# Altium PCB VDMEDA_7SegDisp.PcbDoc
Units mil, origin at the board's own origin, x right, y up, seen from the top; angles counter-clockwise.
Board outline 6000 x 4000 mil, 2 copper layers (Top Layer, Bottom Layer); 2 components, 10 nets, 20 pads, 8 vias.
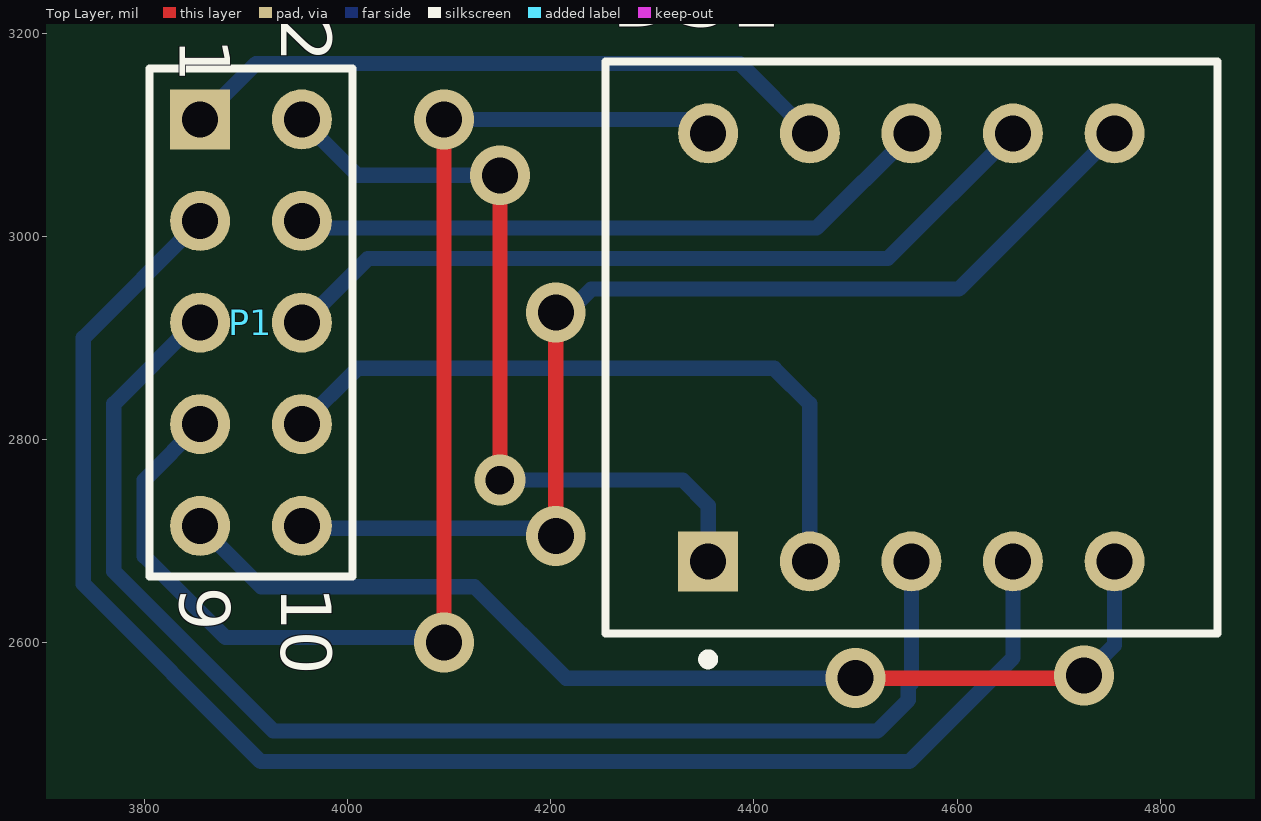
[diagram p0: Top Layer view]
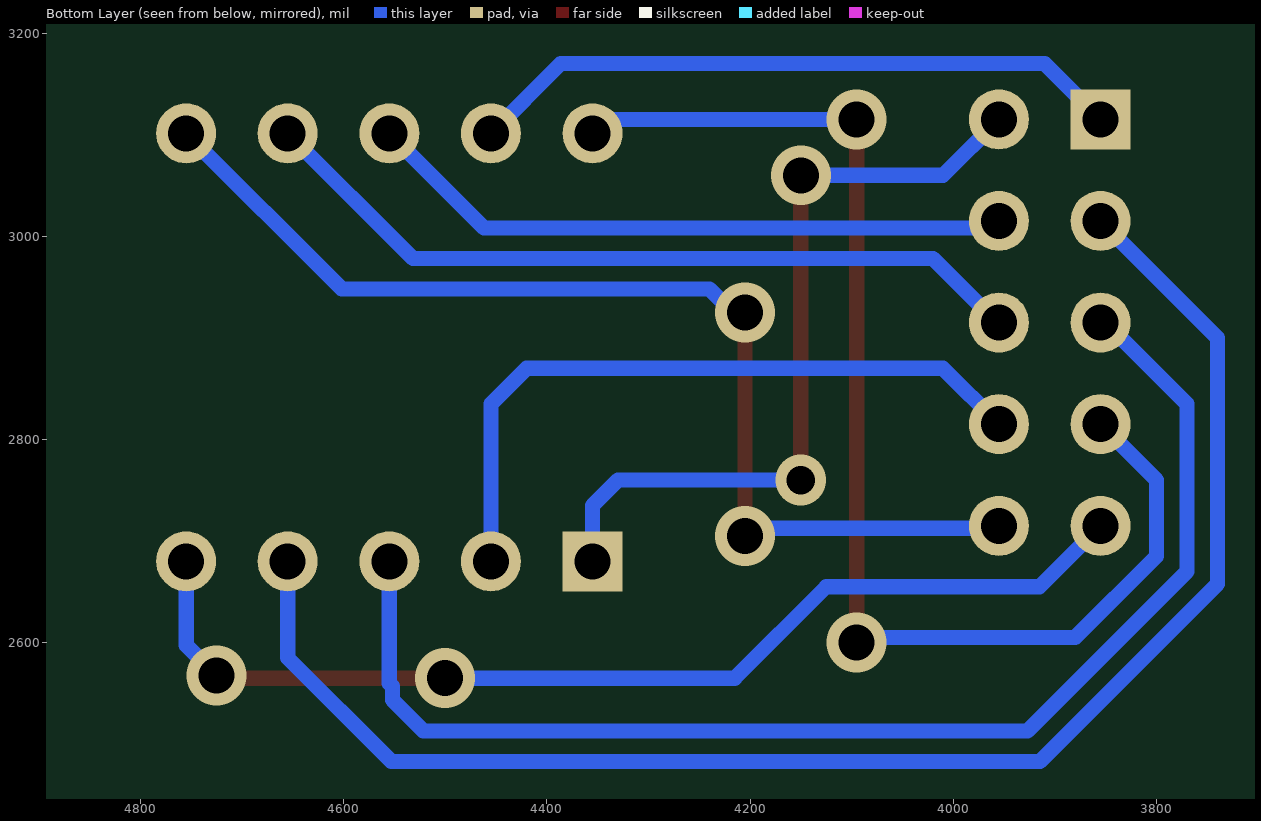
[diagram p1: Bottom Layer view, seen from below]

## Layer stack, top to bottom
Top Solder: solder mask 0.4, Solder Resist, Dk 3.5
Top Layer: signal copper 1.4
Dielectric 1: dielectric 12.6, FR-4, Dk 4.8
Bottom Layer: signal copper 1.4
Bottom Solder: solder mask 0.4, Solder Resist, Dk 3.5

## Board outline
1000,1000 7000,1000 7000,5000 1000,5000

## Design rules (kind name [scope] priority, off if disabled: settings)
Clearance [All] p1: gap=15
ComponentClearance [All] p1 off: gap=10 collisioncheckmode=3 verticalgap=10 showdistances=FALSE
Height [All] p1 off: minheight=0 maxheight=1000 prefheight=500
PolygonConnect [All] p1: connectstyle=Relief reliefconductorwidth=10 reliefentries=4 polygonreliefangle="90 Angle" airgapwidth=10
RoomDefinition VDMEDA_7SegDisp [InComponentClass('VDMEDA_7SegDisp')] p1: confinementstyle=ConfineIn formatcopy=TRUE lockcomponents=FALSE outline 3690,2435 4905,2435 4905,3225 3690,3225
RoutingVias [All] p1: holewidth=35.43 width=59 viastyle="Through Hole" minholewidth=35.43 minwidth=59 maxholewidth=35.43 maxwidth=59
SolderMaskExpansion [All] p1: expansion=4
UnpouredPolygon [All] p1: allowunpoured=FALSE
Width [All] p1: maxlimit=15 minlimit=15 preferedwidth=15
27 further rules are at their usual default settings.

## Components (designator, comment, footprint, x,y, rotation, side; value= is the part's Value field where it differs from the comment)
DS1 "HDSM-577G" HDSM-577 4555,2890.63 r0 top
P1 "Header 5X2" HDR2X5 3855,3115 r270 top

## Footprints (in the part's own frame and the unit in brackets; to place one, negate y for a bottom-side part, rotate by r counter-clockwise, add the part's x,y. Pads: shape width x height; smd on the part's side, far side on the other; paste and mask are expansions set on the pad)
HDR2X5 [mm] "Connector; Header; 5x2 Position"
  rect 1.5x1.5 hole 0.9: 1(0,0)
  round 1.5 hole 0.9: 2(0,2.54) 3(2.54,0) 4(2.54,2.54) 5(5.08,0) 6(5.08,2.54) 7(7.62,0) 8(7.62,2.54) 9(10.16,0) 10(10.16,2.54)
  silkscreen extent -1.27,-1.27 11.43,3.81
HDSM-577 [mm] "LED, 7-Segment Display, 9.2 mm, Dual Digit; 10 Leads; Row Space 10.7 mm; Pitch 2.54 mm"
  rect 1.5x1.5 hole 0.9: 1(-5.08,-5.35)
  round 1.5 hole 0.9: 2(-2.54,-5.35) 3(0,-5.35) 4(2.54,-5.35) 5(5.08,-5.35) 6(5.08,5.35) 7(2.54,5.35) 8(0,5.35) 9(-2.54,5.35) 10(-5.08,5.35)
  silkscreen extent -7.65,-7.92 7.65,7.15

## Part data
DS1: "9.2 mm Green 7-Segment Display: 2-Digit, RH DP"
P1: "Header, 5-Pin, Dual row"

## Via types
v1: diameter 59, hole 35.43, Top Layer to Bottom Layer, 7 vias
v2: diameter 50, hole 28, Top Layer to Bottom Layer, 1 vias

## Nets (pads, with @x,y where several pads share a name; then routed paths per layer and width w, separated by ;. In a path a pad name is that pad's centre, name@x,y a point inside that pad or via, vN(x,y) a via of type N, cw(c..) or ccw(c..) an arc to the next point about the centre after c; other vN are vias at no path point)
NetDS1_1: DS1.1 P1.2 | length 788.1
  Top Layer w15: v2(4150,2760) v1(4150,3060)
  Bottom Layer w15: P1.2 4010,3060 v1(4150,3060) ; v2(4150,2760) 4330,2760 4355,2735 DS1.1
NetDS1_2: DS1.2 P1.8 | length 692.3
  Bottom Layer w15: P1.8 4010,2870 4420,2870 4455,2835 DS1.2
NetDS1_3: DS1.3 P1.5 | length 1280.6
  Bottom Layer w15: P1.5 3850,2915 3770,2835 3770,2670 3927,2513 4521.54,2513 4552,2543.46 4552,2557 4555,2560 DS1.3
NetDS1_4: DS1.4 P1.3 | length 1529.6
  Bottom Layer w15: P1.3 3740,2900 3740,2657.57 3914.57,2483 4553,2483 4655,2585 DS1.4
NetDS1_5: DS1.5 P1.9 | length 1058.1
  Top Layer w15: v1(4500,2565) 4722.5,2565 v1(4725,2567.5)
  Bottom Layer w15: P1.9 3915,2655 4125,2655 4215,2565 v1(4500,2565) ; v1(4725,2567.5) 4755,2597.5 DS1.5
NetDS1_6: DS1.6 P1.10 | length 1098.6
  Top Layer w15: v1(4205,2705) v1(4205,2925)
  Bottom Layer w15: P1.10 3955,2712.5 4197.5,2712.5 v1(4205,2705) ; v1(4205,2925) 4217,2925 4240,2948 4601.74,2948 DS1.6
NetDS1_7: DS1.7 P1.6 | length 777.2
  Bottom Layer w15: P1.6 3957,2915 4020,2978 4531.74,2978 DS1.7
NetDS1_8: DS1.8 P1.4 | length 641.5
  Bottom Layer w15: P1.4 3962,3008 4461.74,3008 DS1.8
NetDS1_9: DS1.9 P1.1 | length 651.3
  Bottom Layer w15: P1.1 3910,3170 4386.26,3170 DS1.9
NetDS1_10: DS1.10 P1.7 | length 1263.7
  Top Layer w15: v1(4095,2600) v1(4095,3115)
  Bottom Layer w15: P1.7 3800,2760 3800,2685 3880,2605 4090,2605 v1(4095,2600) ; v1(4095,3115) 4341.26,3115 DS1.10

## Text inside footprints (layer, text, board x,y; h text height)
P1: Top Overlay "10" at 3935,2655 h50 r270; Top Overlay "9" at 3835,2655 h50 r270; Top Overlay "1" at 3835,3195 h50 r270; Top Overlay "2" at 3935,3215 h50 r270